# Altium PCB CAN-to-CAN.PcbDoc
Units mil, origin at the board's own origin, x right, y up, seen from the top; angles counter-clockwise.
Board outline 3985 x 3980 mil, 2 copper layers (Top Layer, Bottom Layer); 112 components, 87 nets, 366 pads, 106 vias.
Unrouted connection lines stored in the file: 203.
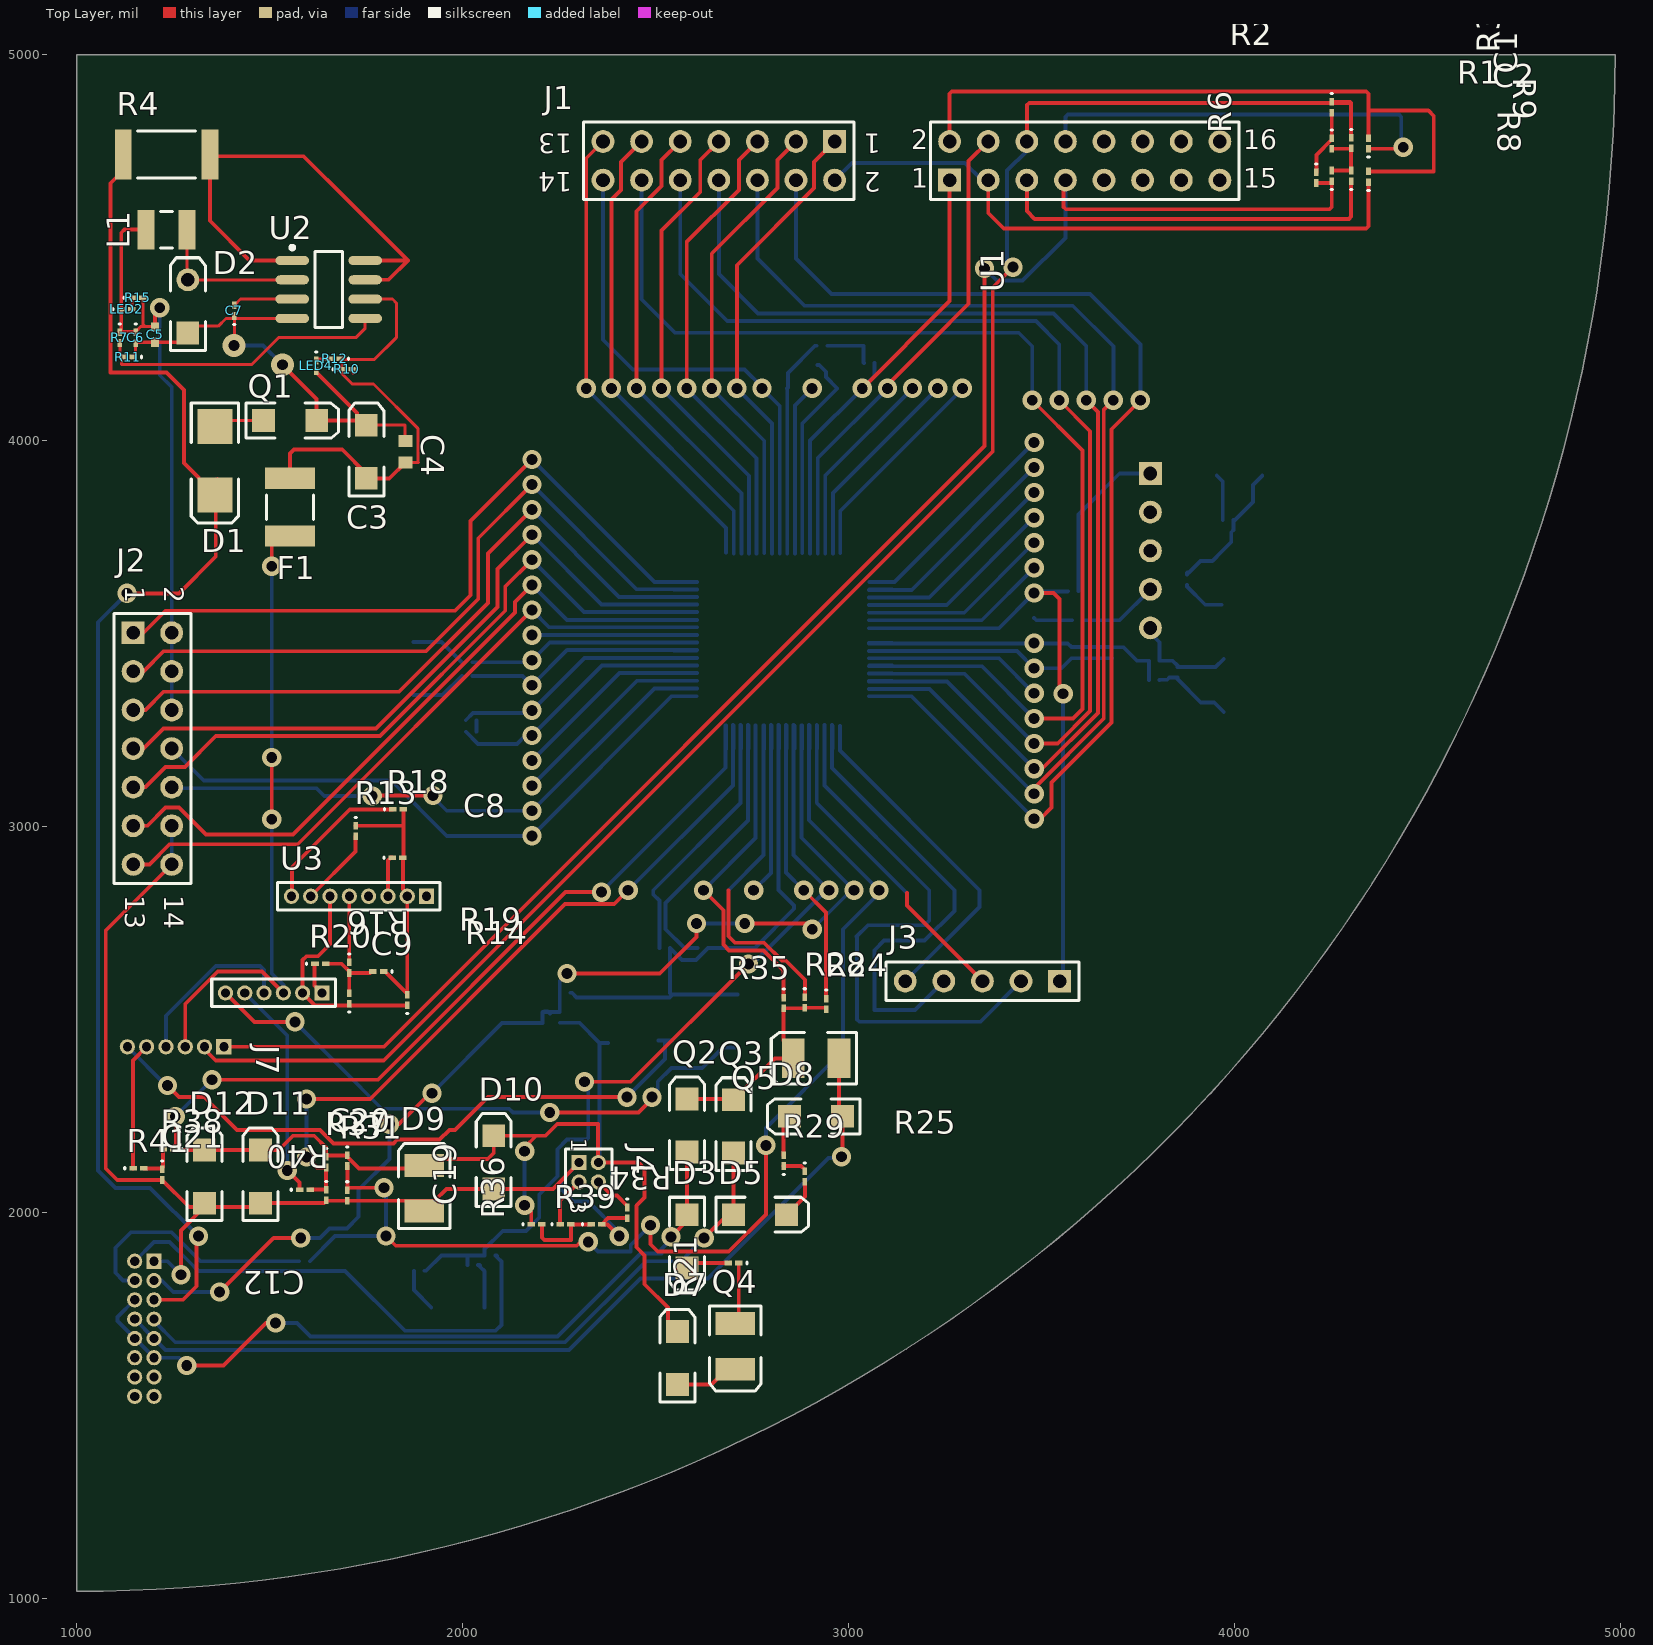
[diagram p0: Top Layer view]
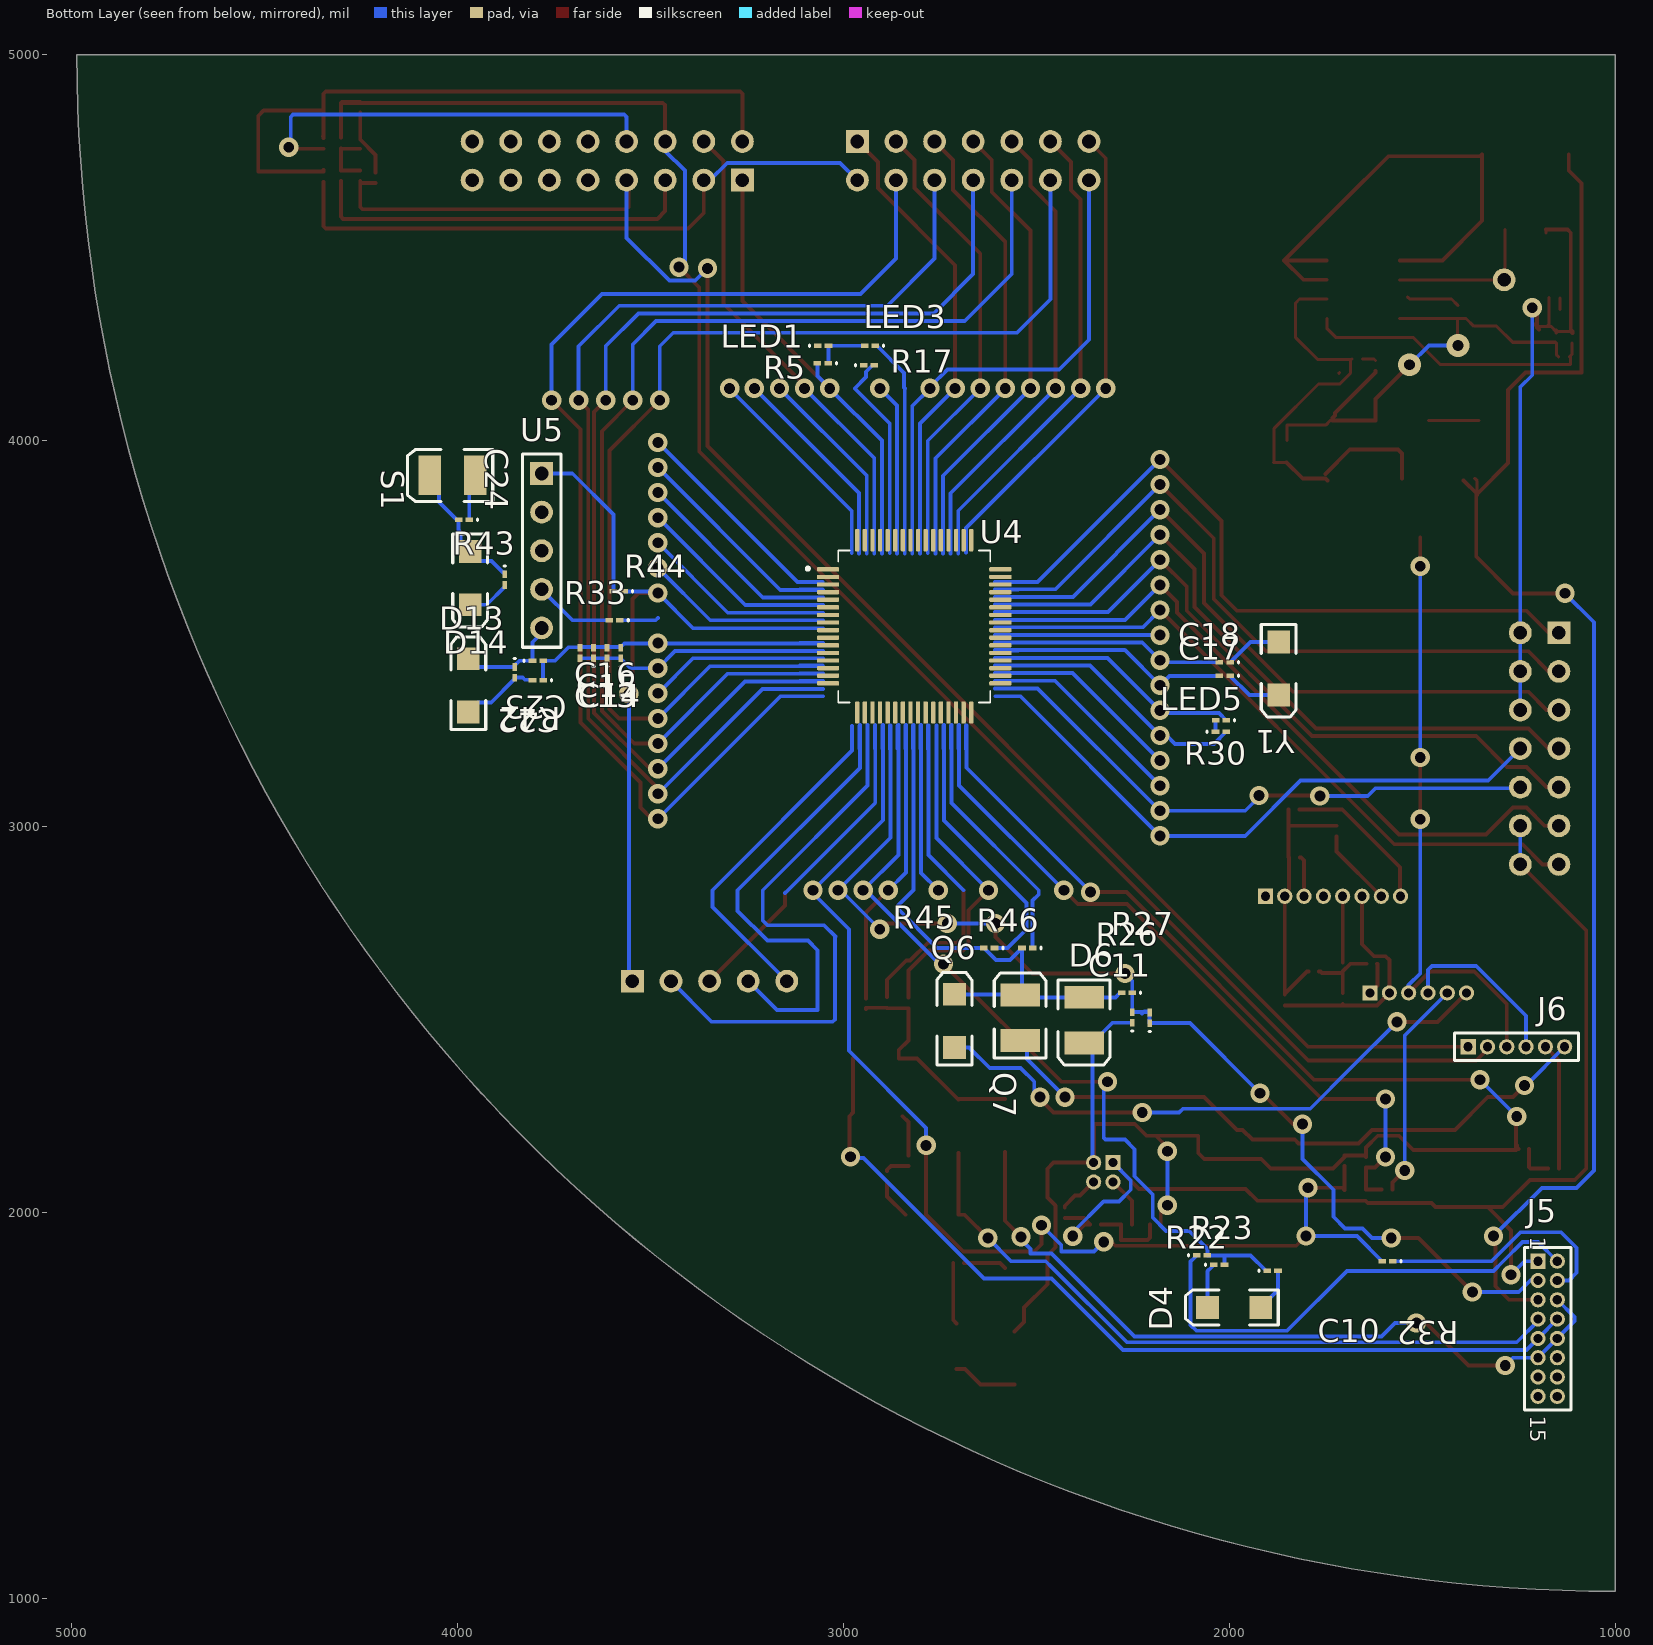
[diagram p1: Bottom Layer view, seen from below]

## Layer stack, top to bottom
Top Solder: solder mask 0.4, Solder Resist, Dk 3.5
Top Layer: signal copper 1.4
Dielectric 1: dielectric 12.6, FR-4, Dk 4.8
Bottom Layer: signal copper 1.4
Bottom Solder: solder mask 0.4, Solder Resist, Dk 3.5

## Board outline
1000,1020 1000,5000 4985,5000 cw(c1002.5,5002.5)

## Design rules (kind name [scope] priority, off if disabled: settings)
Clearance [All] p1 off: gap=5 ignorepadtopadclearanceinfootprint=TRUE except(0: Arc-Hole Track-Hole SMDPad-Hole THPad-Hole Via-Hole Fill-Hole Poly-Hole Region-Hole Text-Hole)
PolygonConnect [All] p1: connectstyle=Relief reliefconductorwidth=10 reliefentries=4 polygonreliefangle="90 Angle" airgapwidth=10
RoutingVias [All] p1: holewidth=28 width=50 viastyle="Through Hole" minholewidth=28 minwidth=50 maxholewidth=28 maxwidth=50
SolderMaskExpansion [All] p1: expansion=4 istentingtop=FALSE
Width [All] p1: maxlimit=10 minlimit=10 preferedwidth=10
30 further rules are at their usual default settings.

## Components (designator, comment, footprint, x,y, rotation, side; value= is the part's Value field where it differs from the comment)
C1 "100n" 0603 4345.91,4684.14 r90 top
C2 "4n7" 0603 4250.91,4770.36 r270 top value=100n
C3 "100n" 3.2X1.6X1.1#1 1750,3971.75 r90 top
C4 "10u/16" 1608[0603] 1851.45,3971.75 r90 top value=470u/16
C5 "100u/6V3" 0402 1202.69,4275.05 r270 top value=470u/16
C6 "100n" 0603 1152.57,4267.17 r270 top
C7 "100p" 0603 1407.57,4337.17 r90 top value=100pF
C8 "100n" 0603 1830.91,2920.36 r0 top
C9 "4n7" 0603 1780.91,2625.36 r180 top value=100n
C10 "100n" 0603 1887.13,1850.36 r180 bottom
C11 "100n" 0603 2264.69,2570.36 r0 bottom
C12 "100n" 0603 1700.91,2045.36 r270 top
C13 "100n" 0603 3681.54,3450.52 r90 bottom
C14 "100n" 0603 3611.54,3450.52 r90 bottom
C15 "100n" 0603 3646.54,3450.52 r90 bottom
C16 "100n" 0603 3576.54,3450.52 r90 bottom
C17 "27p" 0603 2011.38,3391.31 r0 bottom value=100n
C18 "27p" 0603 2011.38,3426.31 r0 bottom value=100n
C19 "100n" 0603 2345.91,1970.36 r0 top
C20 "100n" 0603 1645.91,2046.58 r270 top
C21 "100n" 0603 1220.91,2099.14 r270 top
C22 "100n" 0603 3790.91,3430.36 r180 bottom
C23 "100n" 0603 3790.91,3380.36 r0 bottom
C24 "10n" 0603 3982.13,3795.36 r0 bottom value=100pF
D1 "P6SMB15A" SMB 1357.5,3948.13 r270 top
D2 "LL5817" 3.2X1.6X1.1#2 1287.57,4348.27 r90 top
D3 "LL4148" 3.2X1.6X1.1#1 2580.91,1926.46 r270 top
D4 "BAT54S" 3.2X1.6X1.1#1 1987.01,1755.36 r0 bottom
D5 "LL4148" 3.2X1.6X1.1#1 2769.81,1995.36 r0 top
D6 "BAT54S" 3.5X2.8X1.9 2375.91,2499.41 r270 bottom
D7 "BAT54S" 3.2X1.6X1.1#1 2555.91,1624.25 r90 top
D8 "LL4148" 3.2X1.6X1.1#1 2914.81,2250.36 r180 top
D9 "BAT54S" 3.5X2.8X1.9 1900,2064.06 r90 top
D10 "BAT54S" 3.2X1.6X1.1#1 2080,2131.1 r90 top
D11 "BAT54S" 3.2X1.6X1.1#1 1475.91,2094.25 r90 top
D12 "BAT54S" 3.2X1.6X1.1#1 1330.91,2094.25 r90 top
D13 "LL4148" 3.2X1.6X1.1#1 3970.91,3366.46 r90 bottom
D14 "LL4448" 3.2X1.6X1.1#1 3965.91,3644.25 r270 bottom
F1 "Fuse 1" 1812 1552.4,3828.04 r90 top
J1 "Header 7X2" HDR2X7 2963.07,4775.36 r180 top
J2 "Header 7X2" HDR2X7 1145.91,3502.92 r270 top
J3 "ZL201" HDR1X5 3545.91,2600.36 r180 top
J4 "MX-43045-0400" MHDR2X2 2300.91,2130.36 r270 top
J5 "MX-43045-0800" MHDR2X8 1200,1875 r270 bottom
J6 "MX-43045-0600" MHDR1X6 1380.91,2430.36 r180 bottom
J7 "MX-43045-0600" MHDR1X6 1635,2570 r180 top
L1 "DL22-330" 14-1210 1232.57,4547.17 r180 top value=100uH
LED1 "HCL-1904AYL" 0603 3051.7,4246.31 r180 bottom
LED2 "HCL-1903BG4" 0603 1129,4340.69 r0 top
LED3 "HCL-1906BR1" 0603 2930.32,4246.31 r0 bottom
LED4 "HCL-1904AYL" 0603 1620.71,4194.33 r270 top
LED5 "HCL-1906BR1" 0603 2021.38,3276.31 r0 bottom
Q1 "BSS138" 3.2X1.6X1.1#1 1552.4,4052.46 r0 top
Q2 "BSS123" 3.2X1.6X1.1#1 2580.91,2226.46 r90 top
Q3 "BSS123" 3.2X1.6X1.1#1 2700.91,2224.25 r90 top
Q4 "BSS123" 3.5X2.8X1.9 2705.91,1654.41 r270 top
Q5 "BSS123" 3.5X2.8X1.9 2914.96,2400.36 r180 top
Q6 "BSS123" 3.2X1.6X1.1#1 2711.54,2497.41 r90 bottom
Q7 "BSS123" 3.5X2.8X1.9 2541.54,2505.37 r90 bottom
R1 "CAN0001" 0603 4210.91,4681.58 r270 top
R2 "CAN0001" 0603 4250.91,4864.14 r270 top
R3 "nc" 0603 4300.91,4686.58 r90 top value=1K
R4 "1R" RESC6332 1232.57,4742.17 r180 top value=1K
R5 "4k7" 0603 3052.76,4201.31 r0 bottom value=1K
R6 "1k" 0603 4345.91,4770.36 r90 top value=1K
R7 "3k6 1%" 0603 1111.79,4267.17 r270 top value=1K
R8 "68" 0603 4300.91,4771.58 r270 top value=1K
R9 "68" 0603 4250.91,4686.58 r90 top value=1K
R10 "1M" 0603 1699.3,4185.27 r0 top value=1K
R11 "1k2 1%" 0603 1132.57,4217.17 r180 top value=1K
R12 "4k7" 0603 1668.48,4212.1 r180 top value=1K
R13 "CAN0001" 0603 1722.13,2989.14 r270 top
R14 "CAN0001" 0603 1855.91,2551.58 r90 top
R15 "1k8" 0603 1157.67,4370.69 r0 top value=1K
R16 "nc" 0603 1705.91,2635.36 r270 top value=1K
R17 "4k7" 0603 2932.92,4196.31 r180 bottom value=1K
R18 "1k" 0603 1832.13,3045.36 r0 top value=1K
R19 "68" 0603 1705.91,2555.36 r90 top value=1K
R20 "68" 0603 1630.91,2645.36 r0 top value=1K
R21 "10k" 0603 2700.91,1870.36 r180 top value=1K
R22 "10k" 0603 2025.91,1865.36 r180 bottom value=1K
R23 "1k" 0603 2070,1890 r180 bottom value=1K
R24 "4k7" 0603 2940.91,2541.58 r270 top value=1K
R25 "10k" 0603 2885.91,2094.14 r270 top value=1K
R26 "10k" 0603 2250.91,2506.58 r90 bottom value=1K
R27 "1k" 0603 2205.91,2505.36 r90 bottom value=1K
R28 "4k7" 0603 2885.91,2545.36 r270 top value=1K
R29 "10k" 0603 2830.91,2135.36 r90 top value=1K
R30 "1k8" 0603 2021.54,3246.31 r180 bottom value=1K
R31 "10k" 0603 1700.91,2135.36 r270 top value=1K
R32 "1k" 0603 1590,1875 r0 bottom value=1K
R33 "nc" 0603 3591.97,3535.36 r0 bottom value=1K
R34 "4k7" 0603 2425.91,2000.36 r270 top value=1K
R35 "4k7" 0603 2830.91,2544.14 r270 top value=1K
R36 "10k" 0603 2190.91,1970.36 r0 top value=1K
R37 "10k" 0603 1645.91,2131.58 r270 top value=1K
R38 "10k" 0603 1237.13,2165.36 r180 top value=1K
R39 "470" 0603 2265.91,1970.36 r0 top value=1K
R40 "1k" 0603 1590.91,2060.36 r0 top value=1K
R41 "1k" 0603 1159.69,2115.36 r0 top value=1K
R42 "4k7" 0603 3850.91,3400.36 r270 bottom value=1K
R43 "10k" 0603 3875.91,3640.36 r270 bottom value=1K
R44 "4k7" 0603 3580.91,3610.36 r0 bottom value=1K
R45 "4k7" 0603 2621.54,2686.31 r0 bottom value=1K
R46 "4k7" 0603 2522.76,2686.31 r0 bottom value=1K
S1 "DTSM32NB" 3.5X2.8X1.9 4011.85,3910.36 r0 bottom
U1 "MCP2551-I/SN" HDR2X8 3260.91,4675.36 r0 top
U2 "MC33063AD" SO8_N 1652.57,4392.17 r0 top
U3 "MCP2551-I/SN" MHDR1X8 1905.91,2820.36 r180 top
U4 "PIC30F5011" QFP50P1200X1200X120-64N 2815.75,3519.54 r180 bottom
U5 "MCP1320-46LT" HDR1X5 3780.91,3915.36 r270 bottom
Y1 "10MHz" 3.2X1.6X1.1#1 1871.54,3410.21 r270 bottom

## Footprints (in the part's own frame and the unit in brackets; to place one, negate y for a bottom-side part, rotate by r counter-clockwise, add the part's x,y. Pads: shape width x height; smd on the part's side, far side on the other; paste and mask are expansions set on the pad)
3.2X1.6X1.1#1 [mm] "SMT LED; 2 Flat Leads"
  rect 1.5x1.5 smd: 1(-1.75,0) 2(1.75,0)
  silkscreen extent -2.9,-1.15 3.2,1.15
3.2X1.6X1.1#2 [mm] "SMT LED; 2 Flat Leads"
  rect 1.5x1.5 smd: 1(-1.75,0)
  round 1.5 hole 0.9: 2(1.75,0)
  silkscreen extent -2.9,-1.15 3.2,1.15
3.5X2.8X1.9 [mm] "SM LED; 2 C-Bend Leads; Body 3.5 x 2.8 x 1.9 mm, inc leads (LxWxH typ)"
  rect 1.5x2.6 smd: 1(-1.5,0) 2(1.5,0)
  silkscreen extent -2.65,-1.7 2.95,1.7
14-1210 [mm] "Chip Resistor, Body 3.2x2.5mm, IPC High Density"
  rect 1.1x2.6 smd: 1(-1.35,0) 2(1.35,0)
  silkscreen extent -0.4,-1.2 0.4,1.2, body extent -1.68,-1.32 1.68,1.32, height 0.9
0402 [mm] "Chip Capacitor, Body 1.0x0.5mm, IPC High Density"
  rect 0.6x0.5 smd: 1(-0.5,0) 2(0.5,0)
  body extent -0.55,-0.3 0.55,0.3, height 1.3
0603 [mm] "Chip Inductor, Body 0.6x0.3mm, IPC High Density"
  rect 0.5x0.3 smd: 1(-0.35,0) 2(0.35,0)
  silkscreen extent -0.9,-0.05 -0.9,0.05, body extent -0.33,-0.18 0.33,0.18, height 0.55
1608[0603] [mm] "Chip Capacitor, Body 1.6x0.8mm, IPC High Density"
  rect 0.8x0.9 smd: 1(-0.7,0) 2(0.7,0)
  body extent -0.87,-0.48 0.87,0.48, height 1.3
1812 [mm] "Chip Capacitor, Body 4.5x3.2mm, IPC High Density"
  rect 1.4x3.3 smd: 1(-1.9,0) 2(1.9,0)
  silkscreen extent -0.8,-1.55 0.8,1.55, body extent -2.4,-1.7 2.4,1.7, height 1.4
HDR1X5 [mm] "Connector; Header; 5 Position"
  rect 1.5x1.5 hole 0.9: 1(0,0)
  round 1.5 hole 0.9: 2(2.54,0) 3(5.08,0) 4(7.62,0) 5(10.16,0)
  silkscreen extent -1.27,-1.27 11.43,1.27
HDR2X7 [mm] "Connector; Header; 7x2 Position"
  rect 1.5x1.5 hole 0.9: 1(0,0)
  round 1.5 hole 0.9: 2(0,2.54) 3(2.54,0) 4(2.54,2.54) 5(5.08,0) 6(5.08,2.54) 7(7.62,0) 8(7.62,2.54) 9(10.16,0) 10(10.16,2.54) 11(12.7,0) 12(12.7,2.54) 13(15.24,0) 14(15.24,2.54)
  silkscreen extent -1.27,-1.27 16.51,3.81
HDR2X8 [mm] "Connector; Header; 8x2 Position"
  rect 1.5x1.5 hole 0.9: 1(0,0)
  round 1.5 hole 0.9: 2(0,2.54) 3(2.54,0) 4(2.54,2.54) 5(5.08,0) 6(5.08,2.54) 7(7.62,0) 8(7.62,2.54) 9(10.16,0) 10(10.16,2.54) 11(12.7,0) 12(12.7,2.54) 13(15.24,0) 14(15.24,2.54) 15(17.78,0) 16(17.78,2.54)
  silkscreen extent -1.27,-1.27 19.05,3.81
MHDR1X6 [mm] "Connector; Header; 6 Position"
  rect 1x1 hole 0.6: 1(0,0)
  round 1 hole 0.6: 2(1.27,0) 3(2.54,0) 4(3.81,0) 5(5.08,0) 6(6.35,0)
  silkscreen extent -0.9,-0.9 7.25,0.9
MHDR1X8 [mm] "Connector; Header; 8 Position"
  rect 1x1 hole 0.6: 1(0,0)
  round 1 hole 0.6: 2(1.27,0) 3(2.54,0) 4(3.81,0) 5(5.08,0) 6(6.35,0) 7(7.62,0) 8(8.89,0)
  silkscreen extent -0.9,-0.9 9.79,0.9
MHDR2X2 [mm] "Connector; Header; 2x2 Position"
  rect 1x1 hole 0.6: 1(0,0)
  round 1 hole 0.6: 2(0,1.27) 3(1.27,0) 4(1.27,1.27)
  silkscreen extent -0.9,-0.9 2.17,2.17
MHDR2X8 [mm] "Connector; Header; 8x2 Position"
  rect 1x1 hole 0.6: 1(0,0)
  round 1 hole 0.6: 2(0,1.27) 3(1.27,0) 4(1.27,1.27) 5(2.54,0) 6(2.54,1.27) 7(3.81,0) 8(3.81,1.27) 9(5.08,0) 10(5.08,1.27) 11(6.35,0) 12(6.35,1.27) 13(7.62,0) 14(7.62,1.27) 15(8.89,0) 16(8.89,1.27)
  silkscreen extent -0.9,-0.9 9.79,2.17
QFP50P1200X1200X120-64N [mm]
  rrect50% 1.47x0.28 smd: 1(-5.67,3.75) 2(-5.67,3.25) 3(-5.67,2.75) 4(-5.67,2.25) 5(-5.67,1.75) 6(-5.67,1.25) 7(-5.67,0.75) 8(-5.67,0.25) 9(-5.67,-0.25) 10(-5.67,-0.75) 11(-5.67,-1.25) 12(-5.67,-1.75) 13(-5.67,-2.25) 14(-5.67,-2.75) 15(-5.67,-3.25) 16(-5.67,-3.75) 33(5.67,-3.75) 34(5.67,-3.25) 35(5.67,-2.75) 36(5.67,-2.25) 37(5.67,-1.75) 38(5.67,-1.25) 39(5.67,-0.75) 40(5.67,-0.25) 41(5.67,0.25) 42(5.67,0.75) 43(5.67,1.25) 44(5.67,1.75) 45(5.67,2.25) 46(5.67,2.75) 47(5.67,3.25) 48(5.67,3.75)
  rrect50% 0.28x1.47 smd: 17(-3.75,-5.67) 18(-3.25,-5.67) 19(-2.75,-5.67) 20(-2.25,-5.67) 21(-1.75,-5.67) 22(-1.25,-5.67) 23(-0.75,-5.67) 24(-0.25,-5.67) 25(0.25,-5.67) 26(0.75,-5.67) 27(1.25,-5.67) 28(1.75,-5.67) 29(2.25,-5.67) 30(2.75,-5.67) 31(3.25,-5.67) 32(3.75,-5.67) 49(3.75,5.67) 50(3.25,5.67) 51(2.75,5.67) 52(2.25,5.67) 53(1.75,5.67) 54(1.25,5.67) 55(0.75,5.67) 56(0.25,5.67) 57(-0.25,5.67) 58(-0.75,5.67) 59(-1.25,5.67) 60(-1.75,5.67) 61(-2.25,5.67) 62(-2.75,5.67) 63(-3.25,5.67) 64(-3.75,5.67)
  silkscreen extent -7.1,-5 5,5
RESC6332 [mm] "Chip Resistor, Body 6.3x3.2mm, IPC High Density"
  rect 1.1x3.3 smd: 1(-2.85,0) 2(2.85,0)
  silkscreen extent -1.9,-1.55 1.9,1.55, body extent -3.22,-1.68 3.22,1.68, height 0.9
SMB [mm] "DO-214-AA/SMB; 2 C-Bend Leads; Body 5.3 x 3.6 mm, inc. leads (LxW)"
  rect 2.3x2.3 smd: 1(-2.25,0) 2(2.25,0)
  silkscreen extent -3.8,-1.55 4.1,1.55
SO8_N [mm] "SOIC, 8-Leads, Body 4.9x3.9mm, Pitch 1.27mm, IPC Medium Density"
  oval 2.2x0.6 smd: 1(-2.4,1.905) 2(-2.4,0.635) 3(-2.4,-0.635) 4(-2.4,-1.905) 5(2.4,-1.905) 6(2.4,-0.635) 7(2.4,0.635) 8(2.4,1.905)
  silkscreen extent -2.52,-2.5 0.9,2.88, body extent -2,-2.5 2,2.5, height 1.75

## Part data
C1 C2 C3 C6 C7 C8 C9 C10 C11 C12 C13 C14 C15 C16 C17 C18 C19 C20 C21 C22 C23 C24: library part Cap, "Capacitor", LatestRevisionDate=17-Jul-2002, LatestRevisionNote="Re-released for DXP Platform.", PackageReference=RAD-0.3, Published=8-Jun-2000, Publisher="Altium Limited"
C4 C5: library part "Cap Pol1", "Polarized Capacitor (Radial)", LatestRevisionDate=17-Jul-2002, LatestRevisionNote="Re-released for DXP Platform.", PackageReference=RB7.6-15, Published=8-Jun-2000, Publisher="Altium Limited"
D1: library part "D Zener", "Zener Diode", LatestRevisionDate=17-Jul-2002, LatestRevisionNote="Re-released for DXP Platform.", PackageReference=DIODE-0.7, Published=8-Jun-2000, Publisher="Altium Limited"
D2 D3 D5 D8 D13: library part 1N4148, "High Conductance Fast Diode", Code_JEDEC=DO-204-AH, ComponentLink1Description="Manufacturer Link", ComponentLink1URL=http://www.fairchildsemi.com/, ComponentLink2Description=Datasheet, ComponentLink2URL=http://www.fairchildsemi.com/ds/1N%2F1N4148.pdf, DatasheetDocument=1997, LatestRevisionDate=17-Jul-2002, LatestRevisionNote="Re-released for DXP Platform.", PackageReference=DO-35, Published=8-Jun-2000, Publisher="Altium Limited"
D4 D6 D7 D9 D10 D11 D12: "Schottky Barrier Double Diode", ComponentLink1Description="Manufacturer Link", ComponentLink1URL=http://www.semiconductors.philips.com/, ComponentLink2Description=Datasheet, ComponentLink2URL=http://www.semiconductors.philips.com/acrobat/datasheets/BAT54_SERIES_4.pdf, DatasheetVersion=4-Mar-2002, LatestRevisionDate=12-Dec-2006, LatestRevisionNote="IPC-7351 Footprint Added.", PackageDescription="3-Pin SOT-23 Package 0.95 mm Pitch, 2.3 mm Lead Span", PackageReference=SOT23, PackageVersion=May-1999, Published=17-Sep-2003, Publisher="Altium Limited"
D14: library part Diode, "Default Diode", PackageDocument=Sep-1996, Code_JEDEC=DO-214-AB, LatestRevisionDate=17-Jul-2002, LatestRevisionNote="Re-released for DXP Platform.", PackageReference=SMC, Published=8-Jun-2000, Publisher="Altium Limited"
F1: "Fuse", LatestRevisionDate=17-Jul-2002, LatestRevisionNote="Re-released for DXP Platform.", PackageReference=PIN-W2/E2.8, Published=8-Jun-2000, Publisher="Altium Limited"
J1 J2: "Header, 7-Pin, Dual row", LatestRevisionDate=17-Jul-2002, LatestRevisionNote="Re-released for DXP Platform.", Publisher="Altium Limited"
J3: library part CON5, "Connector"
J4: library part "Header 2X2", "Header, 2-Pin, Dual row", LatestRevisionDate=17-Jul-2002, LatestRevisionNote="Re-released for DXP Platform.", Publisher="Altium Limited"
J5: library part "Header 4X2A", "Header, 4-Pin, Dual row", LatestRevisionDate=17-Jul-2002, LatestRevisionNote="Re-released for DXP Platform.", Publisher="Altium Limited"
J6 J7: library part "Header 6", "Header, 6-Pin", LatestRevisionDate=17-Jul-2002, LatestRevisionNote="Re-released for DXP Platform.", Publisher="Altium Limited"
L1: library part "Inductor Iron", "Magnetic-Core Inductor", Published=24-Mar-1999, Publisher="Altium Limited", Revision="July-2002: Re-released for DXP Platform."
LED1 LED2 LED3 LED4 LED5: library part LED3, "Typical BLUE SiC LED", Published=8-Jun-2000, Publisher="Altium Limited", Revision 1="Jul-2002: Re-released for DXP Platform.", Revision 2="17-Dec-2003: PCB Footprint replaced."
Q1: "N-Channel Enhancement Mode Vertical DMOS FET", ComponentLink1Description="Manufacturer Link", ComponentLink1URL=http://www.zetex.com/, ComponentLink2Description=Datasheet, ComponentLink2URL=www.zetex.com/3.0/pdf/BSS138.pdf, DatasheetVersion=Mar-96, PackageDescription="SOT-23; 3 Leads; Body 3.1 x 2.5 mm, inc. leads (LxW max), Alternate Lead Configuration", PackageReference=SOT23, PackageVersion=1996, Published=17-Dec-2003, Publisher="Altium Limited"
Q2 Q3 Q4 Q5 Q6 Q7: "N-channel Enhancement Mode Vertical D-MOSFET", ComponentLink1Description="Manufacturer Link", ComponentLink1URL=http://www.semiconductors.philips.com/, ComponentLink2Description=Datasheet, ComponentLink2URL=http://www.semiconductors.philips.com/acrobat/datasheets/BSS123_3.pdf, DatasheetVersion=Apr-1995, LatestRevisionDate=12-Dec-2006, LatestRevisionNote="IPC-7351 Footprint Added.", PackageDescription="3-Pin SOT-23 Package 0.95 mm Pitch, 2.3 mm Lead Span", PackageReference=SOT23, PackageVersion=May-1999, Published=17-Sep-2003, Publisher="Altium Limited"
R1 R2 R13 R14: library part "Res Varistor", "Varistor (Voltage-Sensitive Resistor)", LatestRevisionDate=04-Mar-2005, LatestRevisionNote="PCB Footprint replaced.", PackageReference=6-0805, Published=24-Mar-1999, Publisher="Altium Limited"
R3 R4 R5 R6 R7 R8 R9 R10 R11 R12 R15 R16 R17 R18 R19 R20 R21 R22 R23 R24 R25 R26 R27 R28 R29 R30 R31 R32 R33 R34 R35 R36 R37 R38 R39 R40 R41 R42 R43 R44 R45 R46: library part Res2, "Resistor", LatestRevisionDate=17-Jul-2002, LatestRevisionNote="Re-released for DXP Platform.", PackageReference=AXIAL-0.4, Published=8-Jun-2000, Publisher="Altium Limited"
S1: library part PUSHB, "Switch PushButton"
U1 U3: "High Speed CAN Transceiver, 8-Pin Plastic SOIC, Industrial Grade", Code_JEDEC=MS-012, ComponentLink1Description="Manufacturer Link", ComponentLink1URL=http://www.microchip.com, ComponentLink2Description=Datasheet, ComponentLink2URL=http://ww1.microchip.com/downloads/en/DeviceDoc/21667d.pdf, DatasheetVersion=Nov-2003, LatestRevisionDate=13-Apr-2006, LatestRevisionNote="IPC-7351 Footprint Added.", PackageDescription="8-Pin Plastic Narrow Body Small Outline Integrated Circuit 1.27 mm Pitch", PackageReference=SOIC150-8, PackageVersion=Oct-2005, Published=6-Oct-2005, Publisher="Altium Limited"
U2: "DC-to-DC Converter Control Circuit", Code_IPC=SOIC127P600-8, Code_JEDEC=MS-012-AA, ComponentLink1Description="Manufacturer Link", ComponentLink1URL=http://www.onsemi.com/site/products/taxonomy/0,4438,503,00.html, ComponentLink2Description=Datasheet, ComponentLink2URL=http://www.onsemi.com/pub/Collateral/MC34063A-D.PDF, DatasheetVersion=1988, LatestRevisionDate=13-Apr-2006, LatestRevisionNote="IPC-7351 Footprint Added.", PackageDescription="8-Pin Small Outline Integrated Circuit 1.27 mm Pitch", PackageReference=751-02, Published=17-Jul-2002, Publisher="Altium Limited"
U4: "PIC30F5011 - Up"
U5: library part MCP1320
Y1: library part XTAL, "Crystal Oscillator", LatestRevisionDate=17-Jul-2002, LatestRevisionNote="Re-released for DXP Platform.", PackageReference=R38, Published=8-Jun-2000, Publisher="Altium Limited"

## Via types
v1: diameter 50, hole 28, Top Layer to Bottom Layer, 104 vias
v2: diameter 59.06, hole 28, Top Layer to Bottom Layer, 2 vias

## Nets (pads, with @x,y where several pads share a name; then routed paths per layer and width w, separated by ;. In a path a pad name is that pad's centre, name@x,y a point inside that pad or via, vN(x,y) a via of type N, cw(c..) or ccw(c..) an arc to the next point about the centre after c; other vN are vias at no path point)
+5V: C1.1 C5.1 C6.1 C8.1 C13.1 C14.1 C15.1 C16.1 C22.1 D4.2 D6.2 D7.2 D9.2 D10.2 D11.2 D12.2 D13.2 D14.2 J1.2 J2.2 J2.4 J2.6 J3.2 J4.2 L1.2 LED1.1 LED2.1 LED3.1 LED5.1 R7.1 R22.1 R26.1 R31.1 R36.1 R37.1 R38.1 R42.1 R43.2 U1.3 U3.3 U4.10 U4.19 U4.26 U4.38 U4.57 U5.5 | length 8030.1
  Top Layer w10: R7.1 1110.88,4279.3 1110.88,4283.98 1115.22,4288.32 LED2.1 1115.22,4538.96 1123.43,4547.17 L1.2 ; C6.1 1152.57,4284.89 C6.1@1153.48,4285.79 ; C5.1@1197.84,4288.35 1202.69,4293.19 C5.1 1202.69,4296.7 C5.1@1207.53,4301.54 ; R38.1 1254.84,2165.36 1257.05,2163.15 D12.2 D11.2 1523.15,2163.15 1560,2200 1615,2200 1645.91,2169.09 R37.1 1646.81,2149.14 R31.1 1700.91,2145.2 1730.75,2115.36 1892.24,2115.36 D9.2 1916.77,2139.88 2064.41,2139.88 2080,2155.47 D10.2 2214.12,2200 2244.47,2230.36 2350.05,2230.36 2350.05,2131.21 J4.2 2455.05,2130.36 2470.91,2114.5 2470.91,2039.71 2450,2018.8 2450,1911.05 2470.91,1890.14 2470.91,1815.36 2531.38,1754.88 2531.38,1717.68 D7.2 ; U3.3 1805.91,2913.07 1813.19,2920.36 C8.1 ; U1.3 3360.91,4590.36 3401.26,4550 4340.05,4550 4345.91,4555.86 C1.1
  Bottom Layer w10: R22.1 2043.62,1865.36 2044.53,1864.45 2044.53,1860.51 2055.91,1849.14 D4.2 ; v1(2178.98,3301.78) 2314.77,3437.57 2605.75,3437.57 2545.91,3437.57 2606.58,3437.57 ; R26.1 2301.81,2492.8 2354.25,2440.36 D6.2 ; v1(2753.15,2835.96) 2797.8,2880.6 2797.8,3263.56 2799.46,3262.73 2799.46,3202.37 ; 2840.48,3708.36 2840.48,4135.29 2839.81,4135.96 2842.25,4138.4 2842.25,4175.96 2912.6,4246.31 LED3.1 ; 2937.25,3203 2937.25,3262.73 2936.42,3263.56 2936.42,3107.69 3208.15,2835.96 3208.15,2757.6 3195.91,2745.36 3049.19,2745.36 3020.05,2716.21 3020.91,2715.36 3020.91,2501.21 3026.77,2495.36 3340.91,2495.36 J3.2 ; 3112.56,3456.43 3052.21,3456.43 3052.21,3455.6 3435.16,3455.6 v1(3479.81,3410.96) ; U5.5 3780.91,3502.08 3804.69,3478.3 C22.1 3838.62,3430.36 3850.91,3418.07 R42.1 3949.69,3414.14 D13.2 ; R43.2 3875.91,3622.64 3923.19,3575.36 D14.2
+12V: C3.1 C4.1 D1.2 F1.2 J5.5 R4.2 R10.1 R12.1 U2.6
+12VPWR: F1.1 J6.3 J7.3
ADC0: J1.4 U4.16 | length 559.1
  Bottom Layer w10: 3052.21,3338.32 3162.45,3338.32 v1(3479.81,3020.96)
ADC1: J1.6 U4.15 | length 601.1
  Bottom Layer w10: 3112.56,3358 3052.21,3358 3052.21,3357.18 3208.59,3357.18 v1(3479.81,3085.96)
ADC2: J1.8 U4.14 | length 582
  Bottom Layer w10: 3112.25,3377.69 3052.21,3377.69 3052.21,3376.86 3253.9,3376.86 v1(3479.81,3150.96)
ADC3: J1.10 U4.13 | length 563
  Bottom Layer w10: 3111.93,3397.37 3052.21,3397.37 3052.21,3396.55 3299.22,3396.55 v1(3479.81,3215.96)
ADC4: J1.12 U4.12 | length 544.9
  Bottom Layer w10: 3112.45,3417.89 3053.04,3417.89 3052.21,3416.23 3344.53,3416.23 v1(3479.81,3280.96)
ButD: C10.1 R22.2 R23.2 U4.23 | length 724.2
  Bottom Layer w10: C10.1 1904.84,1850.36 1944.49,1890 2012.13,1890 ; R22.2 2012.13,1890 ; R23.2 2012.13,1890 ; 2859.34,3202.49 2859.34,3261.9 2856.86,3263.56 2856.86,2927.25 v1(2948.15,2835.96)
ButD_IN: J5.2 R23.1 | length 189
  Bottom Layer w10: R23.1 2087.72,1890 2088.62,1889.09 2088.62,1885.16 2100,1873.78 2100,1710
ButN: C11.1 R26.2 R27.2 U4.22 | length 640.2
  Bottom Layer w10: R27.2 2205.91,2519.45 2206.81,2520.36 R26.2 C11.1 ; 2878.19,3202.06 2878.19,3262.73 2877.37,3262.73 2877.37,2971.74 v1(3013.15,2835.96)
ButN_IN: J5.3 R27.1 | length 49.7
  Bottom Layer w10: R27.1 2205.91,2516.42 2211.77,2522.28 2220.05,2522.28 2225.91,2516.42
ButR: C12.1 R31.2 R32.2 U4.21 | length 635.4
  Top Layer w10: C12.1 R31.2 ; 1789.69,2059.14 1795.91,2065.36
  Bottom Layer w10: 2897.88,3202.37 2897.88,3262.73 2897.05,3263.56 2897.05,3017.06 v1(3078.15,2835.96)
ButR_IN: J5.4 R32.1
CAN_BMS_RX: U3.4 U4.58 | length 446.1
  Bottom Layer w10: 2860.16,3708.36 2860.16,4091.31 v1(2904.81,4135.96)
CAN_BMS_TX: R17.2 U3.1 U4.59 | length 548
  Bottom Layer w10: 2879.02,3709.18 2879.02,4045.17 2969.81,4135.96 2940.36,4165.4 2940.36,4179.02 2923.08,4196.31 R17.2
CAN_BMSS_H: J7.1 R13.2 R20.1 U3.7 | length 252
  Top Layer w10: U3.7 1722.13,2936.58 R13.2 ; 1615.91,2617.93 1615.91,2644.45 1616.81,2645.36 R20.1 ; J7.1@1620.31,2584.69 J7.1
CAN_BMSS_L: J7.2 R14.1 R19.1 U3.6 | length 153.2
  Top Layer w10: R19.1 1705.91,2538.7 1706.81,2537.8 R14.1
CAN_MUX_RX: U1.4 U4.61 | length 502.4
  Bottom Layer w10: 2919.22,3708.36 2919.22,3955.37 v1(3099.81,4135.96)
CAN_MUX_TX: R5.2 U1.1 U4.60 | length 1195.2
  Top Layer w10: v1(3034.81,4135.96) 3260.91,4362.06 U1.1
  Bottom Layer w10: 2899.53,3708.36 2899.53,4000.68 v1(3034.81,4135.96) 3066.54,4167.69 R5.2
CAN_MUXED_H: J6.1 R1.2 R9.1 U1.7 | length 878.8
  Top Layer w10: U1.7 3555.91,4670.36 3555.91,4605.86 3561.77,4600 4245.05,4600 4250.91,4605.86 R9.1@4250.91,4668.86 ; R1.2 4249.84,4667.8 R9.1@4250.91,4668.86 ; R9.1 R9.1@4250.91,4668.86
CAN_MUXED_L: J6.2 R2.1 R8.1 U1.6 | length 1077.1
  Top Layer w10: U1.6 3461.77,4776.21 3461.77,4869.5 3467.62,4875.36 4300.91,4875.36 ; R2.1 4298.35,4877.92 4300.91,4875.36 ; R8.1 4300.91,4875.36
ChrgLED: R45.1 U4.29 | length 781.6
  Bottom Layer w10: R45.1 2573.69,2686.31 2525,2735 2525,2802.8 2738.74,3016.55 2738.74,3263.56 2740.4,3262.73 2740.4,3203
ChrgLED_OUT: J7.6 Q6.1
FluidHeater: R46.1 U4.30 | length 739.3
  Bottom Layer w10: R46.1 2508.98,2809.31 2493.15,2825.13 2493.15,2835.96 2719.06,3061.86 2719.06,3263.56 2720.71,3262.73 2720.71,3202.69
FluidHeater_OUT: J6.6 Q7.1
GND: C1.2 C2.1 C3.2 C4.2 C5.2 C6.2 C7.1 C8.2 C9.1 C10.2 C11.2 C12.2 C13.2 C14.2 C15.2 C16.2 C17.2 C18.2 C19.2 C20.2 C21.2 C22.2 C23.1 C24.1 D2.1 D4.1 D6.1 D7.1 D9.1 D10.1 D11.1 D12.1 J1.14 J2.12 J2.14 J3.3 J4.1 J5.1 LED4.2 Q1.2 Q2.2 Q3.2 Q4.2 Q5.2 Q6.2 Q7.2 R1.1 R2.2 R6.2 R11.1 R13.1 R14.2 R15.2 R18.2 R24.2 R28.2 R34.2 R35.2 R45.2 R46.2 S1.1 U1.2 U2.4 U3.2 U4.9 U4.20 U4.25 U4.41 U4.56 U5.2 | length 7944.1
  Top Layer w10: LED4.2 1620.71,4176.61 1725.47,4071.85 1725.47,4065.18 1731.87,4058.78 1731.87,4052.46 Q1.2 ; R13.1 1843.47,3002.92 1845.91,3005.36 ; C9.1 1798.62,2625.36 1853.78,2570.2 1855,2570.2 R14.2@1855.91,2569.29 ; R18.2 1845.91,3005.36 ; R14.2 R14.2@1855.91,2569.29 ; D7.1 2644.25,1555.36 2684.25,1595.36 Q4.2 ; Q2.2 2698.7,2295.36 Q3.2 2808.11,2400.36 Q5.2 2855.91,2422.01 2830.91,2447.01 R35.2 2885,2530.36 2885.91,2531.26 R28.2 2940,2531.58 2940.91,2530.67 R24.2 ; 3150.31,2828.8 3150.31,2795.96 J3.3 ; U1.2 3260.91,4899.14 3266.77,4905 4340.05,4905 4345.91,4899.14 4345.91,4855.36 ; R1.1 4210.91,4740.2 4250.91,4780.2 C2.1 R2.2 ; C1.2@4345.91,4701.85 C1.2 4515.05,4697.92 4515.05,4841.21 4500.91,4855.36 4345.91,4855.36 ; R6.2 R6.2@4345.91,4788.07 ; R6.2@4346.81,4788.98 R6.2@4345.91,4788.07 ; 1845.91,3005.36 1845.91,2921.26 1845,2920.36 C8.2 1844.69,2839.52 1855.91,2828.3 U3.2 R14.2@1855.91,2569.29 ; R6.2@4345.91,4788.07 4345.91,4855.36
  Bottom Layer w10: C10.2 1873.35,1800.12 D4.1 ; v1(2178.98,3496.78) 2179.65,3497.45 2606.58,3497.45 2606.58,3496.63 2546.54,3496.63 ; C11.2 2282.4,2570.36 2294.29,2558.47 D6.1 2535.58,2558.47 Q7.2 ; Q6.2 2543.43,2566.31 Q7.2 ; v1(2774.81,4135.96) 2820.79,4089.97 2820.79,3708.36 ; 2819.14,3202.69 2819.14,3262.73 2817.49,3263.56 2817.49,2836.62 2857.91,2796.2 2857.91,2787.91 2756.31,2686.31 R45.2 2604.01,2655 2567.85,2655 R46.2 2536.54,2569.42 Q7.2 ; 2917.56,3202.69 2917.56,3262.73 2916.74,3263.56 2916.74,3062.37 3143.15,2835.96 3150.31,2828.8 ; 3112.25,3476.11 3052.21,3476.11 3052.21,3475.29 3479.14,3475.29 v1(3479.81,3475.96) ; C13.2 3681.54,3464.45 3682.45,3465.36 3710.91,3465.36 3745.91,3430.36 C22.2 C23.1 ; S1.1 3968.35,3894.8 C24.1
GPIOC13: J2.3 U4.47 | length 601.1
  Bottom Layer w10: v1(2178.98,3886.78) 2450.2,3615.56 2606.58,3615.56 2606.58,3614.74 2546.22,3614.74
GPIOC14: J2.1 U4.48 | length 559.1
  Bottom Layer w10: v1(2178.98,3951.78) 2496.34,3634.42 2606.58,3634.42
GPIOD0: J2.5 U4.46 | length 582
  Bottom Layer w10: v1(2178.98,3821.78) 2404.89,3595.88 2606.58,3595.88 2606.58,3595.05 2546.54,3595.05
GPIOD1: J1.13 U4.49 | length 575.7
  Bottom Layer w10: v1(2319.81,4135.96) 2681.34,3774.42 2681.34,3710.01
GPIOD2: J1.11 U4.50 | length 558.9
  Bottom Layer w10: v1(2384.81,4135.96) 2701.85,3818.91 2701.85,3708.36
GPIOD3: J1.9 U4.51 | length 540.2
  Bottom Layer w10: v1(2449.81,4135.96) 2721.54,3864.22 2721.54,3708.36
GPIOD4: J1.7 U4.52 | length 521.4
  Bottom Layer w10: v1(2514.81,4135.96) 2741.22,3909.54 2741.22,3708.36
GPIOD5: J1.5 U4.53 | length 502.6
  Bottom Layer w10: v1(2579.81,4135.96) 2760.91,3954.85 2760.91,3708.36
GPIOD6: J1.3 U4.54 | length 483
  Bottom Layer w10: v1(2644.81,4135.96) 2780.59,4000.17 2780.59,3709.18
GPIOD7: J1.1 U4.55 | length 465.4
  Bottom Layer w10: v1(2709.81,4135.96) 2801.11,4044.66 2801.11,3708.36
GPIOD8: J2.13 U4.42 | length 446.1
  Bottom Layer w10: v1(2178.98,3561.78) 2223.63,3517.14 2606.58,3517.14
GPIOD9: J2.11 U4.43 | length 465.2
  Bottom Layer w10: v1(2178.98,3626.78) 2269.77,3536 2606.58,3536
GPIOD10: J2.9 U4.44 | length 483.6
  Bottom Layer w10: v1(2178.98,3691.78) 2314.26,3556.51 2606.58,3556.51
GPIOD11: J2.7 U4.45 | length 563
  Bottom Layer w10: v1(2178.98,3756.78) 2359.57,3576.19 2606.58,3576.19 2606.58,3575.37 2546.85,3575.37
GROUND: D1.1 J6.4 J7.4 Q1.1
ILUM: J4.4 R34.1 | length 104.7
  Top Layer w10: J4.4 2386.39,2044.87 2399.11,2044.87 2425.91,2018.07 R34.1
IMP: C19.1 R36.2 R39.2 U4.11 | length 669.5
  Top Layer w10: R36.2 2204.69,1936.58 2210.91,1930.36 2280.05,1930.36 2280.05,1969.99 R39.2 C19.1
  Bottom Layer w10: 3052.21,3436.74 3389.02,3436.74 v1(3479.81,3345.96)
IMP_IN: J4.3 R39.1 | length 130.2
  Top Layer w10: R39.1 2252.13,2031.58 J4.3
IsFHerror: C21.1 R38.2 R41.2 U4.32 | length 724.2
  Top Layer w10: R41.2 1220,2115.36 1220.91,2116.26 1220.91,2116.85 1223.35,2119.29 R38.2
  Bottom Layer w10: v1(2358.98,2830.96) 2363.15,2835.96 2680.52,3153.32 2680.52,3262.73 2681.34,3262.73 2681.34,3202.06
IsFHerror_IN: J6.5 R41.1 | length 329.5
  Top Layer w10: R41.1 1145.91,2395.36 J6.5
IsHeating: C20.1 R37.2 R40.2 U4.31 | length 700.8
  Top Layer w10: R40.2 C20.1 R37.2
  Bottom Layer w10: v1(2428.15,2835.96) 2699.37,3107.18 2699.37,3263.56 2701.03,3262.73 2701.03,3202.37
IsHeating_IN: J7.5 R40.1 | length 568.5
  Top Layer w10: v1(1545,2110) 1576.52,2078.48 1576.52,2061.26 1577.13,2060.65 R40.1
  Bottom Layer w10: J7.5 1545,2460 v1(1545,2110)
LightD: R24.1 U4.24 | length 812.7
  Top Layer w10: v1(2883.15,2835.96) 2940.91,2778.2 R24.1
  Bottom Layer w10: 2838.83,3203 2838.83,3262.73 2837.17,3263.56 2837.17,2881.94 v1(2883.15,2835.96)
LightD_OUT: D3.1 J5.6 Q2.1 | length 162.2
  Top Layer w10: D3.1 Q2.1
LightN: R28.1 U4.27 | length 694.9
  Top Layer w10: 2688.19,2791.81 2688.19,2835.92 ; 2826.48,2653.52 2836.48,2653.52 2885.91,2604.09 R28.1
  Bottom Layer w10: 2688.15,2835.96 2778.94,2926.74 2778.94,3262.73 2779.77,3262.73 2779.77,3202.06
LightN_OUT: D5.1 J5.7 Q3.1 | length 160
  Top Layer w10: D5.1 Q3.1
LightR: R35.1 U4.28 | length 899.1
  Top Layer w10: v1(2623.15,2835.96) 2675.09,2784.02 2675.09,2694.91 2689.86,2680.14 2778.97,2680.14 2830.91,2628.2 R35.1
  Bottom Layer w10: v1(2623.15,2835.96) 2758.43,2971.23 2758.43,3262.73
LightR_OUT: D8.1 J5.8 Q5.1 | length 260.2
  Top Layer w10: Q5.1 2974.02,2260.04 D8.1 2983.7,2148.15 2980.91,2145.36
MCLR: J3.1 R44.1 U4.7 | length 627.1
  Top Layer w10: v1(3479.81,3605.96) 3530.31,3605.96 3545.91,3590.36
  Bottom Layer w10: 3052.21,3514.66 3388.51,3514.66 v1(3479.81,3605.96) 3483.3,3609.45 3566.22,3609.45 R44.1
NetC2_2: C2.2 R3.2 R8.2 R9.2 | length 157.8
  Top Layer w10: R9.2 R3.2 R8.2@4300.91,4757.48 ; C2.2 4300,4756.58 R8.2@4300.91,4757.48 ; R8.2 R8.2@4300.91,4757.48
NetC7_2: C7.2 U2.3
NetC9_2: C9.2 R16.2 R19.2 R20.2 | length 188.6
  Top Layer w10: R20.2 1686.06,2645.36 1705.91,2625.51 R16.2 ; R19.2 R16.2 ; C9.2 1763.19,2625.36 1759.41,2621.58 R16.2
NetC17_1: C17.1 U4.39 Y1.2 | length 526.7
  Bottom Layer w10: v1(2178.98,3366.78) 2270.28,3458.08 2606.58,3458.08 2605.75,3456.43 2546.34,3456.43
NetC18_1: C18.1 U4.40 Y1.1 | length 507.2
  Bottom Layer w10: v1(2178.98,3431.78) 2224.96,3477.77 2606.58,3477.77 2606.58,3476.94 2546.85,3476.94
NetC24_2: C24.2 D14.1 R43.1 S1.2 U5.3 | length 359.8
  Bottom Layer w10: R43.1 3875.91,3658.07 3876.81,3658.98 3880.75,3658.98 3910.4,3688.62 3941.38,3688.62 D14.1 3990.44,3737.68 3990.44,3763.33 3995.91,3768.8 C24.2 3999.84,3795.36 4046.38,3841.89 4046.38,3885.83 S1.2
NetD2_2: D2.2 L1.1 U2.2
NetD3_2: D3.2 R21.2 | length 111.5
  Top Layer w10: D3.2 2593.7,1870.36 R21.2
NetD5_2: D5.2 R25.2 | length 104.6
  Top Layer w10: D5.2 2885.91,2042.56 R25.2
NetD8_2: D8.2 R29.2 | length 107.4
  Top Layer w10: R29.2 2830.91,2235.36 D8.2
NetLED1_2: LED1.2 R5.1 | length 45.5
  Bottom Layer w10: LED1.2 3037.92,4202.22 3038.82,4201.31 R5.1
NetLED2_2: LED2.2 R15.1
NetLED3_2: LED3.2 R17.1 | length 93.8
  Bottom Layer w10: LED3.2 3037.92,4246.31
NetLED4_1: LED4.1 R12.2
NetLED5_2: LED5.2 R30.1
NetQ1_3: R10.2
NetQ4_1: Q4.1 R21.1 R25.1 R29.1 | length 223.5
  Top Layer w10: Q4.1 2714.69,1722.25 R21.1 ; R29.1 2876.18,2121.58 2885.91,2111.85 R25.1
NetR3_1: R3.1 U1.5 | length 1022.8
  Top Layer w10: U1.5 3460.91,4595.36 3481.26,4575 4295.05,4575 4300.91,4580.86 R3.1
NetR4_1: R4.1 U2.1 U2.7 U2.8 | length 428.1
  Top Layer w10: R4.1 1344.78,4569.97 1447.57,4467.17 U2.1
NetR6_1: R6.1 U1.8 | length 1111.1
  Top Layer w10: R6.1 4432.13,4756.58 4435.91,4760.36
  Bottom Layer w10: U1.8 3560.91,4839.14 3566.77,4845 4425.05,4845 4430.91,4839.14 4430.91,4765.36 4435.91,4760.36
NetR7_2: R7.2 R11.2 U2.5
NetR16_1: R16.1 U3.5 | length 171.2
  Top Layer w10: R16.1 U3.5
NetR18_1: R18.1 U3.8 | length 398.9
  Top Layer w10: U3.8 1557.13,2821.58 1557.13,2895.36 1707.13,3045.36 R18.1
NetR30_2: R30.2 U4.37 | length 502.6
  Bottom Layer w10: v1(2178.98,3236.78) 2360.08,3417.89 2606.58,3417.89
NetR33_2: R33.2 U4.8 | length 208.3
  Bottom Layer w10: R33.2 3700.91,3535.36 3780.91,3615.36
PGC: J3.5 U4.17 | length 951.2
  Bottom Layer w10: 2977.45,3202.49 2977.45,3261.9 2976.62,3261.9 2976.62,3197.49 3338.15,2835.96 3338.15,2792.6 J3.5
PGD: J3.4 U4.18 | length 1289.2
  Bottom Layer w10: 2957.76,3202.49 2957.76,3261.9 2956.11,3263.56 2956.11,3153 3273.15,2835.96 3273.15,2782.6 3195.91,2705.36 3090.91,2705.36 3065.91,2680.36 3065.91,2526.21 3066.77,2525.36 3170.91,2525.36 J3.4
RESET: C23.2 D13.1 R42.2 R44.2 U5.1 | length 637.7
  Bottom Layer w10: R44.2 3594.69,3809.14 3701.77,3916.21 3702.62,3915.36 U5.1 ; C23.2 3805.59,3381.26 3824.69,3381.26 3830,3386.58 R42.2 3850.91,3382.64 3911.46,3322.09 3946.38,3322.09 D13.1
RX: J2.10 U4.34 | length 619.5
  Bottom Layer w10: v1(2178.98,3041.78) 2496.03,3358.83 2606.58,3358.83 2605.75,3358 2546.34,3358
TX: J2.8 U4.33 | length 576.5
  Bottom Layer w10: v1(2178.98,2976.78) 2540.52,3338.32 2605.75,3338.32
WDI: R33.1 U5.4 | length 100.7
  Bottom Layer w10: 3479.81,3540.96 3485.41,3535.36 R33.1
pads on no net: J5.9 J5.10 J5.11 J5.12 J5.13 J5.14 J5.15 J5.16 U1.9 U1.10 U1.11 U1.12 U1.13 U1.14 U1.15 U1.16 U4.1 U4.2 U4.3 U4.4 U4.5 U4.6 U4.35 U4.36 U4.62 U4.63 U4.64
copper on no net: | length 82116.4
  Top Layer w7.87: 1111.79,4253.39 1111.79,4224.17 1118.79,4217.17 ; 1112.4,4281.56 1113.76,4282.92 1152.57,4282.92 1166.35,4296.7 1202.69,4296.7 ; 1115.29,4220.67 1115.29,4199.45 1117.57,4197.17 1452.57,4197.17 1522.57,4267.17 1722.57,4267.17 1747.06,4291.66 1747.06,4317.17 ; 1142.78,4340.69 1142.78,4369.57 ; 1146.45,4217.07 1152.57,4223.19 1152.57,4253.39 1154.54,4255.36 1265.76,4255.36 1307.57,4297.17 1366.35,4297.17 1386.35,4317.17 1408.79,4317.17 ; 1171.45,4370.69 1171.45,4301.8 1176.55,4296.7 ; 1179.42,4539.02 1179.42,4547.17 ; 1285.72,4547.17 1285.72,4419.02 1287.57,4417.17 1558.08,4417.17 ; 1353.5,4052.46 1483.5,4052.46 ; 1357.5,3859.55 1357.5,3896.46 1363.89,3902.85 ; 1407.57,4350.95 1423.79,4367.17 1532.57,4367.17 1537.57,4372.17 ; v2@1408.79,4248.39 1408.79,4317.17 ; 1497.57,4467.17 1558.08,4467.17 ; v2@1548.5,4187.46 v2@1550.05,4187.46 ; 1558.08,4317.17 1408.79,4317.17 ; 1620.71,4208.11 1624.7,4212.1 1654.7,4212.1 ; 1682.26,4212.1 1685.52,4208.84 1685.52,4185.27 1685.52,4175.44 1713.5,4147.46 1723.33,4147.46 1768.5,4147.46 1883.5,4032.46 1883.5,3945.92 ; 1683.89,4210.47 1770.87,4210.47 1827.57,4267.17 1827.57,4357.17 1817.57,4367.17 1747.06,4367.17 ; 1714.14,4176.88 1715.87,4175.15 ; 1738.19,4052.46 1750,4040.65 1850.43,4040.65 1850.43,4000.33 ; 1749.99,3902.85 1750.38,3902.46 ; 1851.45,3944.19 1885.24,3944.19
  Top Layer w10: 1120.37,4742.17 1120.37,4699.97 1087.57,4667.17 1087.57,4177.17 1123.82,4177.17 1196.32,4177.17 1232.57,4177.17 1277.57,4132.17 1277.57,3942.17 1357.5,3862.24 ; v1(1130,3605) 1265,3605 1360,3700 1360,3859.74 ; 1145.91,2902.92 1187.92,2902.92 1240,2955 1572.2,2955 2178.98,3561.78 ; 1145.91,3002.92 1182.92,3002.92 1230,3050 1265,3050 1335,2980 1339.06,2980 1560,2980 2135,3555 2135,3582.8 2178.98,3626.78 ; 1145.91,3102.92 1177.92,3102.92 1230,3155 1280,3155 1360,3235 1785,3235 2110,3560 2110,3622.8 2178.98,3691.78 ; 1145.91,3202.92 1172.92,3202.92 1225,3255 1700,3255 1775,3255 2090,3570 2090,3667.8 2178.98,3756.78 ; 1145.91,3302.92 1177.92,3302.92 1225,3350 1835,3350 2065,3580 2065,3707.8 2178.98,3821.78 ; 1145.91,3402.92 1172.92,3402.92 1225,3455 1905,3455 2040,3590 2040,3747.8 2178.98,3886.78 ; 1145.91,3502.92 1172.92,3502.92 1230,3560 1980,3560 2020,3600 2020,3792.8 2178.98,3951.78 ; 1200,1775 1260,1775 1275,1775 1310,1810 1310,1935 v1(1315,1940) ; 1202.69,4295.71 1202.69,4332.69 v1(1215,4345) ; v1(1235,2330) 1265,2300 1280,2300 1330,2300 1415,2215 1630,2215 1665,2180 1820,2180 1830,2190 1940,2190 1965,2215 1980,2215 2065,2300 v1(2425,2300) ; 1245.91,2902.92 1075,2732.01 1075,2115 1104.64,2085.36 1220.91,2085.36 1291.26,2015 1465.55,2015 1475.91,2025.36 1640.91,2025.36 1647.13,2031.58 1926.58,2031.58 1957.2,2062.2 2233.47,2062.2 2301.26,2130 2310,2130 ; 1254.84,2165.36 1254.84,2174.84 ; v1(1255,2250) 1257.05,2247.95 1257.05,2163.15 ; v1(1270,1840) 1270,1955 1330,2015 ; 1280.91,2430.36 1280.91,2540.91 1365,2625 1480,2625 1535,2570 ; v1(1285,1605) 1380,1605 1490,1715 v1(1515,1715) ; 1330.91,2430.36 1330.91,2424.09 1360,2395 1795,2395 3372.5,3972.5 3372.5,4397.5 v1(3425,4450) ; 1344.78,4742.17 1349.78,4737.17 1577.57,4737.17 1587.57,4737.17 1704.78,4619.97 1857.57,4467.17 ; v1(1350,2345) 1780,2345 2265.96,2830.96 2358.98,2830.96 ; 1357.5,3859.55 1357.5,3862.1 1392.57,3897.17 ; v1(1370,1795) 1510,1935 v1(1580,1935) ; 1380.91,2430.36 1795.36,2430.36 3351.3,3986.3 v1(3351.3,4446.69) ; 1385,2565 1385,2570 1460,2495 v1(1565,2495) ; v1(1505,3020) v1(1505,3180) ; v1(1505,3675) 1505,3750 ; v2@1532.57,4192.17 v2(1532.57,4197.17) 1564.06,4165.69 1621.3,4108.44 ; 1552.4,3902.85 1552.4,3967 1562.57,3977.17 1687.57,3977.17 1750.38,3914.36 ; v1(1595,2145) 1622.2,2117.8 1645.91,2117.8 ; v1(1595,2295) 1760,2295 2265,2800 2392.2,2800 2428.15,2835.96 ; 1615.91,2617.93 1615.91,2589.09 1635,2570 ; 1655.91,2820.36 1655.91,2695.91 1625,2665 1595,2665 1585,2655 1585,2570 1617.2,2537.8 1706.81,2537.8 ; 1700.91,2059.14 1707.13,2065.36 v1(1795.91,2065.36) ; 1745.09,3897.17 1750.09,3902.17 1809.43,3902.17 1851.45,3944.19 ; 1747.06,4417.17 1807.57,4417.17 1857.57,4467.17 ; 1747.06,4467.17 1857.57,4467.17 ; v1@1765,3081.18 v1(1922.46,3081.18) ; v1(1800.91,1940.36) 1826.26,1915 2295,1915 2305,1925 v1(2325,1925) ; v1(1810,2230) 1835,2230 1915,2310 v1(1920,2310) ; v1(2160,2160) 2160,2170 2190,2200 ; 2177.13,1970.36 v1@2177.13,2002.87 ; v1(2225,2260) 2455,2260 2490,2295 v1(2490,2300) ; v1(2270,2620) 2490,2620 2510,2620 2605,2715 v1(2605,2750) ; v1(2315,2340) 2435,2340 v1(2740,2645) ; 2319.81,4135.96 2319.81,4732.1 2363.07,4775.36 ; 2384.81,4135.96 2384.81,4624.81 2410,4650 2410,4722.29 2463.07,4775.36 ; v1(2405,1940) 2374.64,1970.36 2359.69,1970.36 2375.91,1986.58 2425.91,1986.58 ; 2449.81,4135.96 2449.81,4594.81 2515,4660 2515,4727.29 2563.07,4775.36 ; v1(2486,1968) 2486,1919 2498.28,1906.72 2505,1900 2688.75,1900 2785,1996.25 v1(2785,2175) ; 2514.81,4135.96 2514.81,4544.81 2615,4645 2615,4727.29 2663.07,4775.36 ; v1(2539,1938) 2580.91,1979.91 2580.91,1995.36 ; 2579.81,4135.96 2579.81,4514.81 2715,4650 2715,4727.29 2763.07,4775.36 ; v1(2625,1935) 2685.36,1995.36 2700.91,1995.36 ; 2644.81,4135.96 2644.81,4484.81 2815,4655 2815,4727.29 2863.07,4775.36 ; 2688.19,2791.81 2688.19,2716.81 2705,2700 2780,2700 2826.48,2653.52 ; 2709.81,4135.96 2709.81,4454.81 2910,4655 2910,4722.29 2963.07,4775.36 ; v1(2730,2750) 2890,2750 v1(2905,2735) ; 3099.81,4135.96 3099.81,4144.81 3215,4260 3310,4355 3310,4550 3310,4724.45 3360.91,4775.36 ; v1(3475,4105) 3605,3975 3605,3305 3580.96,3280.96 3479.81,3280.96 ; 3479.81,3020.96 3495.96,3020.96 3525,3050 3525,3115 3680,3270 3680,4030 v1(3755,4105) ; 3479.81,3085.96 3479.81,3099.81 3660,3280 3660,4080 v1(3685,4105) ; 3479.81,3150.96 3500.96,3150.96 3645,3295 3645,4075 v1(3615,4105) ; 3479.81,3215.96 3540.96,3215.96 3625,3300 3625,4025 v1(3545,4105) ; 3545.91,3590.36 3545.91,3354.09 v1(3555,3345) ; 1621.3,4108.44 1621.3,4052.46 1621.3,4108.44
  Bottom Layer w10: 1130,1825 1150,1825 1120,1825 1100,1845 1100,1910 1140,1950 1245,1950 1320,1875 1576.22,1875 ; v1(1130,3605) 1055,3530 1055,2110 1100,2065 1190,2065 v1(1315,1940) ; 1130.91,2430.36 1231.26,2330 v1(1235,2330) ; 1150,1725 1200,1675 1230,1645 1865,1645 2275,1645 2460,1830 2635,1830 2947.35,2142.35 2977.9,2142.35 v1(2980.91,2145.36) ; 1150,1775 1105,1730 1105,1720 1205,1620 ; 1150,1875 1200,1925 1240,1925 1290,1875 1315,1850 1695,1850 1850,1695 2052.18,1695 2085,1695 2100,1710 ; 1200,1625 1265,1625 v1(1285,1605) ; 1200,1725 1200,1720 1255,1665 2265,1665 2460,1860 2475,1875 2565,1875 v1(2625,1935) ; 1200,1825 1220,1825 1250,1795 v1(1370,1795) ; 1200,1875 1235,1875 v1(1270,1840) ; v1(1215,4345) 1215,4170 1245.91,4139.09 1245.91,3502.92 1245.91,3402.92 1245.91,3302.92 ; 1230.91,2430.36 1230.91,2510.91 1360,2640 1475,2640 1485,2630 1485,2570 ; 1245.91,2902.92 1245.91,3002.92 ; 1245.91,3102.92 1248.82,3100 1412.87,3100 1620.96,3100 1640.96,3080 v1(1765,3080) ; 1245.91,3202.92 1328.82,3120 1815,3120 1958.22,2976.78 2178.98,2976.78 ; v1(1255,2250) v1(1350,2345) ; v2(1407.57,4247.17) 1482.57,4247.17 v2(1532.57,4197.17) ; v1(1505,3020) 1505,2620 1535,2590 1535,2570 ; v1(1505,3180) v1(1505,3675) ; v1(1515,1715) 1570,1715 1605,1680 2245,1680 2460,1895 2514.14,1895 2514.14,1906.29 2539,1931.15 v1(2539,1938) ; v1(1565,2495) 1685,2375 1790,2270 2120,2270 2130,2260 v1(2225,2260) ; v1(1580,1935) 1630,1935 1655,1960 1700,1960 1730,1990 1730,2060 1810,2140 v1(1810,2230) ; v1(1595,2295) v1(1595,2145) v1@1600,2145 ; 1603.78,1875 1669.14,1940.36 v1(1800.91,1940.36) ; v1@1795.91,1945.36 v1(1800.91,1940.36) ; v1(1795.91,2065.36) 1800.91,2060.36 v1(1800.91,1940.36) ; 1871.54,3341.31 1947.6,3341.31 1997.6,3391.31 ; 1871.54,3479.11 1944.8,3479.11 1997.6,3426.31 ; v1(1920,2310) 2101.58,2491.58 2205.91,2491.58 ; v1@1920,3080 1958.22,3041.78 2178.98,3041.78 ; 2007.6,3276.31 2026.29,3295 2172.2,3295 2178.98,3301.78 ; 2007.76,3246.31 2039.07,3215 2140,3215 2161.78,3236.78 2178.98,3236.78 2169.45,3246.31 ; 2025.16,3391.31 2154.45,3391.31 2178.98,3366.78 ; 2025.16,3426.31 2173.51,3426.31 2178.98,3431.78 ; 2035.16,3276.31 2035.16,3246.47 2035.32,3246.31 ; 2056.22,1890 2056.22,1906.22 2103.42,1953.42 2163.42,1953.42 2197.81,1987.81 2197.81,2047.81 2245,2095 2245,2165 2270,2190 2320,2190 2325,2195 v1@2325,2330 ; v1(2160,2020) v1(2160,2160) ; v1(2178.98,3106.78) 2450.71,3378.52 2546.54,3378.52 2606.58,3378.52 2546.85,3378.52 ; v1(2178.98,3171.78) 2405.4,3398.2 2546.22,3398.2 2606.58,3398.2 2546.54,3398.2 ; 2250.91,2570.36 2250.91,2600.91 v1(2270,2620) ; 2300.91,2130.36 2255,2084.45 2255,2060 2285,2030 2325,2030 2405,1950 v1(2405,1940) ; v1(2325,1925) 2350,1900 2435,1900 2435,1917 v1(2486,1968) ; 2350.91,2130.36 2354.25,2133.7 2354.25,2440.36 ; 2363.07,4675.36 2363.07,4261.93 2440,4185 2730,4185 2774.81,4140.19 2774.81,4135.96 ; v1(2425,2300) 2523.93,2398.93 2523.93,2446.31 ; 2463.07,4675.36 2463.07,4366.93 2550,4280 3440,4280 3475,4245 v1(3475,4105) ; v1(2490,2300) 2505,2315 2505,2340 2540,2375 2620,2375 2673.52,2428.52 2711.54,2428.52 ; 2506.31,2446.31 2541.54,2446.31 ; 2563.07,4675.36 2563.07,4431.93 2685,4310 3485,4310 3545,4250 v1(3545,4105) ; v1(2605,2750) v1(2730,2750) ; 2663.07,4675.36 2663.07,4431.93 2765,4330 3530,4330 3615,4245 v1(3615,4105) ; v1(2740,2645) 2750,2645 2895,2790 2948.18,2843.18 ; 2763.07,4675.36 2763.07,4471.93 2885,4350 3580,4350 3685,4245 v1(3685,4105) ; v1(2785,2175) 2785,2220 2985,2420 2985,2735 3078.15,2828.15 3078.15,2835.96 ; 2863.07,4675.36 2863.07,4471.93 2955,4380 3625,4380 3755,4250 v1(3755,4105) ; v1(2905,2735) 3005.96,2835.96 3013.15,2835.96 ; 2938.9,3708.36 2938.9,3768.71 2938.9,3910.05 v1(3164.81,4135.96) ; 2958.59,3708.36 2958.59,3769.03 2958.59,3864.74 v1(3229.81,4135.96) ; 2963.07,4675.36 3007.71,4720 3300,4720 3344.64,4675.36 3360.91,4675.36 ; 2977.45,3709.18 2977.45,3818.6 v1@3294.81,4135.96 ; 3052.21,3535.17 3112.88,3535.17 ; 3052.21,3613.91 3111.93,3613.91 3162.76,3613.91 v1(3479.81,3930.96) ; 3053.04,3535.17 3112.45,3535.17 3344.02,3535.17 v1(3479.81,3670.96) ; 3053.04,3614.74 3112.45,3614.74 ; 3053.04,3634.42 3112.45,3634.42 ; 3053.86,3634.42 3118.27,3634.42 v1(3479.81,3995.96) ; 3111.93,3594.22 3052.21,3594.22 3112.25,3594.22 3208.08,3594.22 v1(3479.81,3865.96) ; 3112.25,3574.54 3052.21,3574.54 3112.56,3574.54 3253.39,3574.54 v1(3479.81,3800.96) ; 3112.56,3554.85 3052.21,3554.85 3112.88,3554.85 3298.71,3554.85 v1(3479.81,3735.96) ; v1(3351.3,4446.69) 3383,4415 3450,4415 3560.91,4525.91 3560.91,4585.91 3560.91,4675.36 ; v1(3425,4450) 3410,4465 3410,4505.39 3410,4700 3460.91,4750.91 3460.91,4775.36 ; 3479.14,3475.29 3566.78,3475.29 3576.54,3465.52 3681.54,3465.52 ; 3479.81,3410.96 3550.75,3410.96 3576.54,3436.74 3681.54,3436.74 ; 3545.91,2600.36 3555,2609.45 v1(3555,3345)
  other v1: 3293.98,4135.96 4435.91,4760.36

## Silkscreen, mask and mechanical layers (free items; w line width, h text height)
Mechanical 1:
  the board outline again, w10

## Text inside footprints (layer, text, board x,y; h text height)
J1: Top Overlay "13" at 2283.07,4795.36 h50 r180; Top Overlay "14" at 2283.07,4695.36 h50 r180; Top Overlay "1" at 3083.07,4795.36 h50 r180; Top Overlay "2" at 3083.07,4695.36 h50 r180
J2: Top Overlay "13" at 1125.91,2822.92 h50 r270; Top Overlay "14" at 1225.91,2822.92 h50 r270; Top Overlay "1" at 1125.91,3622.92 h50 r270; Top Overlay "2" at 1225.91,3622.92 h50 r270
J4: Top Overlay "3" at 2278.16,2031.93 h39.37 r270; Top Overlay "1" at 2280.91,2193.35 h39.37 r270
J5: Bottom Overlay "15" at 1220,1475 h39.37 r90; Bottom Overlay "1" at 1220,1937.99 h39.37 r90
U1: Top Overlay "2" at 3160.91,4755.36 h50; Top Overlay "1" at 3160.91,4655.36 h50; Top Overlay "15" at 4020.91,4655.36 h50; Top Overlay "16" at 4020.91,4755.36 h50